# Altium PCB CoreV1.1_test.PcbDoc (part 4 of 14)
Units mil, origin at the board's own origin, x right, y up, seen from the top; angles counter-clockwise.
Board outline 2860 x 2420 mil, 6 copper layers (Top Layer, GND, SIGNAL_1, SIGNAL_2, POWER, Bottom Layer); 110 components, 241 nets, 882 pads, 697 vias.
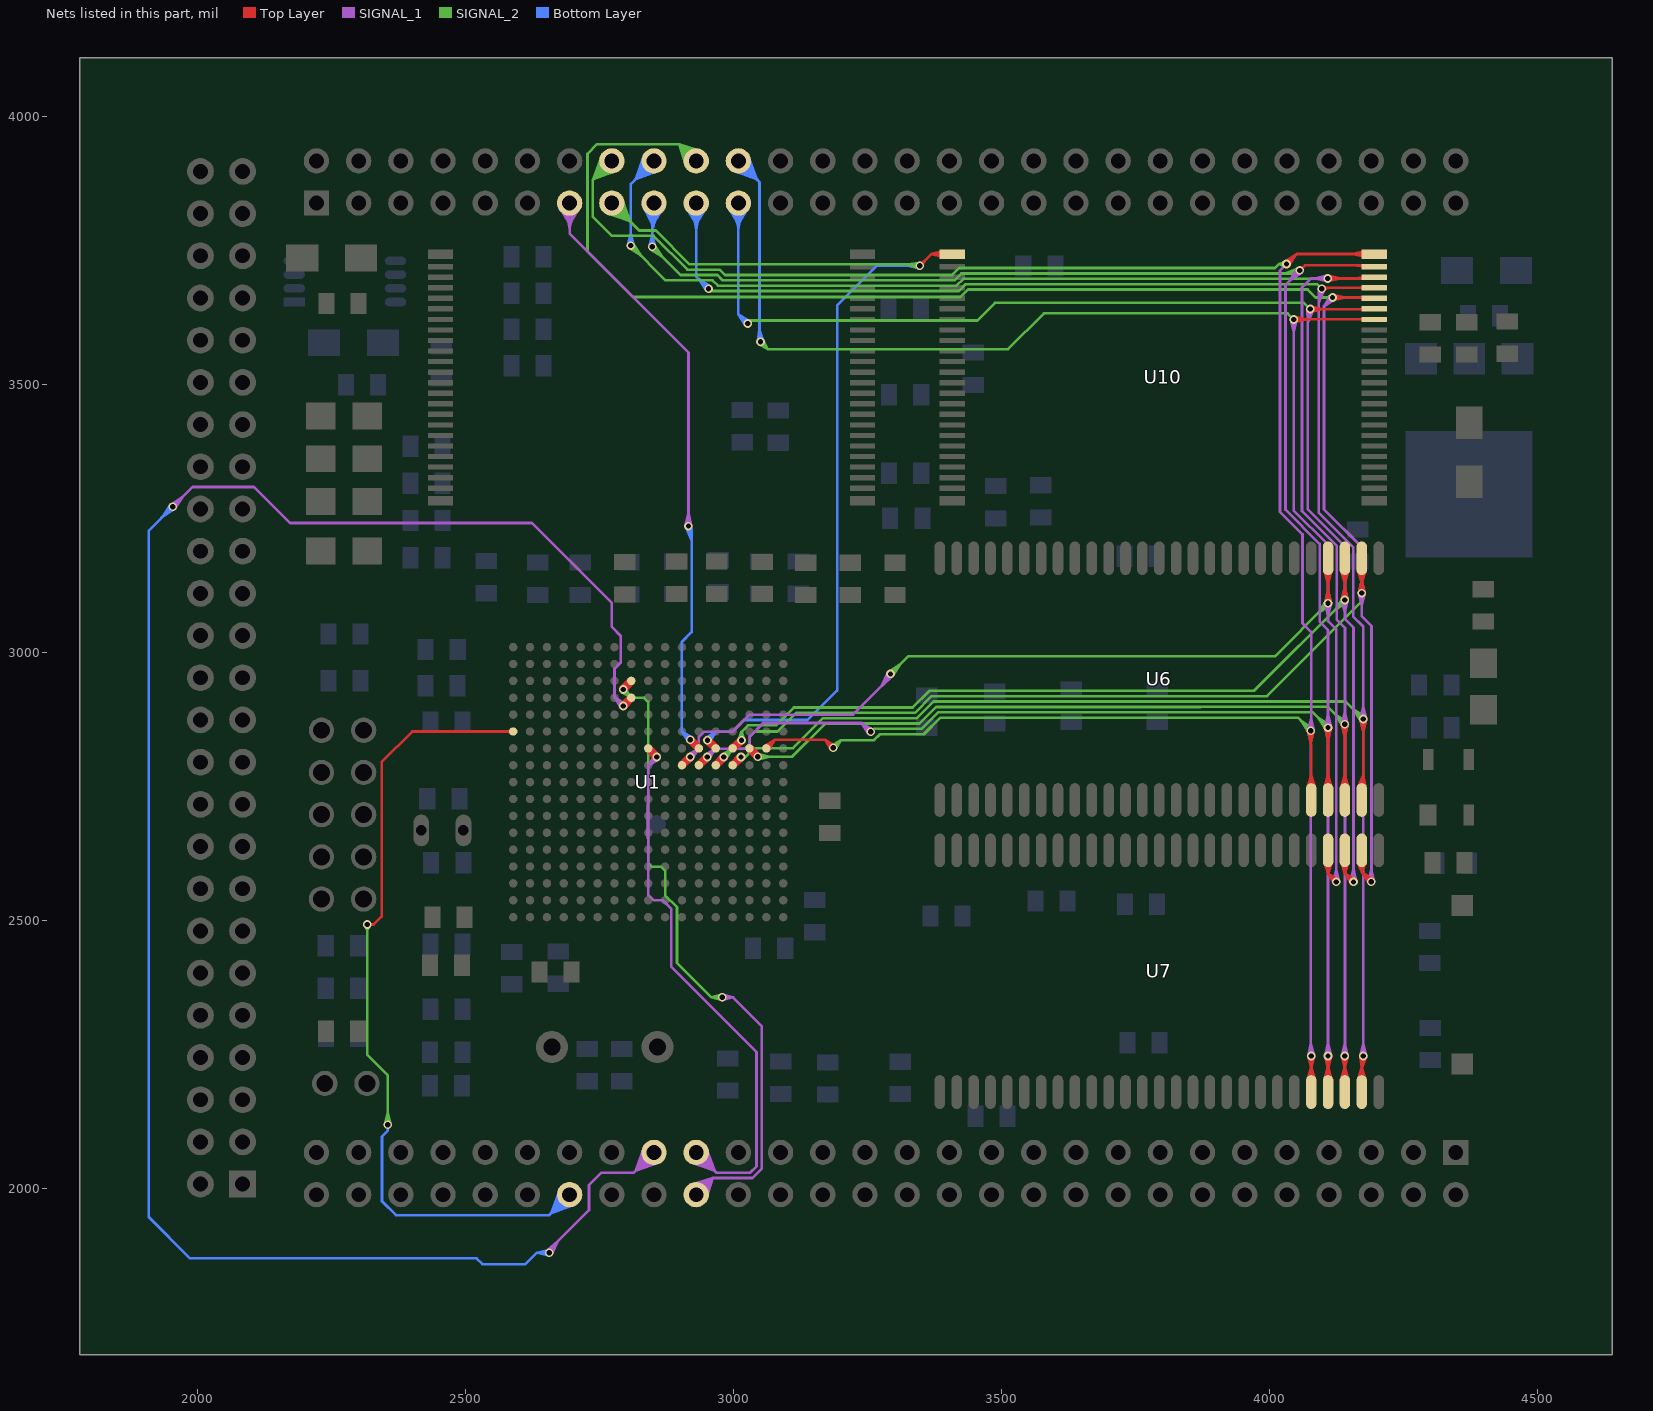
[diagram p8: the nets of this part, all layers, seen from the top]

## Via types
v1: diameter 16, hole 10, Top Layer to Bottom Layer, tented both sides, 637 vias
v2: diameter 30, hole 18, Top Layer to Bottom Layer, tented both sides, 56 vias
v3: diameter 16, hole 10, Top Layer to Bottom Layer, 2 vias
v4: diameter 30, hole 16, Top Layer to Bottom Layer, tented both sides, 1 vias
v5: diameter 16/16/16/16 (per signal layer), hole 10, Top Layer to Bottom Layer, tented both sides, 1 vias

## Nets (pads, with @x,y where several pads share a name; then routed paths per layer and width w, separated by ;. In a path a pad name is that pad's centre, name@x,y a point inside that pad or via, vN(x,y) a via of type N, cw(c..) or ccw(c..) an arc to the next point about the centre after c; other vN are vias at no path point) (continued)
I2SSDO: pad.PA44 U1.U6 | length 2178.9
  Top Layer w5: v1(2316.5,2492.5) 2328.5,2492.5 2343.5,2507.5 2343.5,2795.5 2400.62,2852.62 U1.U6@2588.92,2852.62 ; U1.U6@2585.12,2848.82 ccw(c2575.94,2839.65) 2575.94,2852.62 ccw(c2575.94,2865.6) U1.U6@2585.12,2856.42
  SIGNAL_2 w5: v1@2312.61,2488.61 cw(c2303.22,2479.22) 2316.5,2479.22 cw(c2329.78,2479.22) v1@2320.39,2488.61 ; v1@2316.5,2488.5 2316.5,2249.58 2355,2211.08 v1(2355,2119) ; v1@2349.54,2119.66 2355,2142 v1@2360.46,2119.66 ; v1@2351.11,2122.89 ccw(c2341.72,2132.28) 2355,2132.28 ccw(c2368.28,2132.28) v1@2358.89,2122.89
  Bottom Layer w5: v1(2355,2119) 2355,2108 2344,2097 2344,1976 2370,1950 2655.92,1950 pad.PA44@2694.24,1988.32 ; pad.PA44@2673.11,1988.32 cw(c2622.12,1988.32) 2658.18,1952.26 cw(c2694.24,1916.2) pad.PA44@2694.24,1967.19 ; pad.PA44@2676.4,1999.63 2660.01,1954.09 ; pad.PA44@2678.11,1988.32 cw(c2639.19,1988.32) 2666.71,1960.79 cw(c2694.24,1933.27) pad.PA44@2694.24,1972.19 ; pad.PA44@2681.1,1997.66 2660.01,1954.09 ; pad.PA44@2683.11,1988.32 cw(c2656.26,1988.32) 2675.25,1969.33 cw(c2694.24,1950.34) pad.PA44@2694.24,1977.19 ; pad.PA44@2685.52,1995.22 2660.01,1954.09 ; pad.PA44@2689.64,1992.36 2660.01,1954.09 ; pad.PA44@2698.28,1983.72 2660.01,1954.09 ; pad.PA44@2701.14,1979.6 2660.01,1954.09 ; pad.PA44@2703.58,1975.18 2660.01,1954.09 ; pad.PA44@2705.55,1970.48 2660.01,1954.09
L3CLOCK: pad.PA39 U1.K4 | length 4883.7
  Top Layer w5: v1@2789.69,2903.63 U1.K4@2805.15,2918.92 ; v1@2791.82,2905.28 U1.K4@2812.69,2911.37 ; v1@2794.02,2905.74 ccw(c2794.02,2919.02) 2803.41,2909.63 ccw(c2812.79,2900.24) v1@2799.52,2900.24 ; v1@2797.41,2895.91 U1.K4@2812.69,2911.37 ; v1@2799.06,2898.04 U1.K4@2805.15,2918.92 ; U1.K4@2804.02,2915.61 cw(c2791.04,2915.61) 2800.22,2906.44 cw(c2809.39,2897.27) U1.K4@2809.39,2910.24 ; v1(2794.02,2900.24) U1.K4@2809.39,2915.61 ; v1(2794.02,2900.24) U1.K4@2812.69,2911.37 ; v1(2794.02,2900.24) U1.K4@2805.15,2918.92 ; v1(2794.02,2900.24) U1.K4@2809.39,2915.61 ; U1.K4@2809.39,2915.61 2790.65,2904.59 U1.K4@2809.39,2915.61 ; U1.K4@2809.39,2915.61 2798.37,2896.87 U1.K4@2809.39,2915.61
  SIGNAL_1 w5: v1@1950.04,3276.27 1972.11,3290.61 v1@1957.77,3268.54 ; v1(1953.5,3272) 1990.5,3309 2105,3309 2172.4,3241.6 2624.18,3241.6 2773,3092.78 2773,3047.8 2789.5,3031.3 2789.5,2980.92 2778.02,2969.44 2778.02,2916.24 ; v1@1953.5,3277.5 ccw(c1953.5,3290.78) 1962.89,3281.39 ccw(c1972.28,3272) v1@1959,3272 ; v1@2652.01,1883.78 2672.34,1901.26 ; v1@2656.5,1880 cw(c2669.59,1880) 2660.33,1889.25 ; v1@2660.68,1877.11 2672.34,1901.26 ; v1@2661.5,1880 cw(c2686.66,1880) 2668.87,1897.79 ; v1@2788.52,2900.24 ccw(c2775.24,2900.24) 2784.63,2909.63 ccw(c2794.02,2919.02) v1@2794.02,2905.74 ; v1@2789.68,2896.85 2778.02,2916.24 ; v1@2797.4,2904.57 2778.02,2916.24 ; pad.PA39@2830.59,2067.06 cw(c2779.6,2067.06) 2815.66,2031 cw(c2851.72,1994.94) pad.PA39@2851.72,2045.93 ; pad.PA39@2833.88,2078.37 2817.49,2032.83 ; pad.PA39@2835.59,2067.06 cw(c2796.67,2067.06) 2824.19,2039.53 cw(c2851.72,2012.01) pad.PA39@2851.72,2050.93 ; pad.PA39@2838.58,2076.4 2817.49,2032.83 ; pad.PA39@2840.59,2067.06 cw(c2813.74,2067.06) 2832.73,2048.07 cw(c2851.72,2029.08) pad.PA39@2851.72,2055.93 ; pad.PA39@2843,2073.97 2817.49,2032.83 ; pad.PA39@2847.12,2071.1 2817.49,2032.83 ; pad.PA39@2851.72,2067.06 2814,2029.34 2753.84,2029.34 2730.5,2006 2730.5,1959.42 2656,1884.92 v1(2656,1880) 2672.34,1901.26 ; pad.PA39@2855.76,2062.46 2817.49,2032.83 ; pad.PA39@2858.62,2058.34 2817.49,2032.83 ; pad.PA39@2861.06,2053.92 2817.49,2032.83 ; pad.PA39@2863.03,2049.22 2817.49,2032.83 ; 2778.02,2916.24 v1(2794.02,2900.24) 2778.02,2916.24
  Bottom Layer w5: v1@1948,3272 cw(c1934.72,3272) 1944.11,3262.61 cw(c1953.5,3253.22) v1@1953.5,3266.5 ; v1@1949.23,3275.46 1934.89,3253.39 v1@1956.96,3267.73 ; v1(1953.5,3272) 1909,3227.5 1909,1946.15 1985.59,1869.56 2520.3,1869.56 2531.36,1858.5 2611.56,1858.5 2633.06,1880 ; v1@2652.11,1876.11 ccw(c2642.72,1866.72) 2642.72,1880 ccw(c2642.72,1893.28) v1@2652.11,1883.89 ; v1@2655.34,1874.54 2633.06,1880 ; v1@2655.34,1885.46 2633.06,1880 ; 2633.06,1880 v1(2656,1880) 2633.06,1880
L3DATA: pad.PA38 U1.K3 | length 2277.3
  Top Layer w5: v1@2789.6,2934.3 U1.K3@2805.15,2950.41 ; v1@2791.65,2935.97 U1.K3@2812.69,2942.87 ; v1@2794,2936.5 ccw(c2794,2948.04) 2802.16,2939.88 ; v1@2797.5,2926.76 U1.K3@2812.69,2942.87 ; v1@2799.07,2928.87 U1.K3@2805.15,2950.41 ; v1@2799.5,2931 cw(c2814.52,2931) U1.K3@2803.9,2941.62 ; U1.K3@2804.02,2947.11 cw(c2791.04,2947.11) 2800.22,2937.94 cw(c2809.39,2928.76) U1.K3@2809.39,2941.74 ; v1(2794,2931) U1.K3@2809.39,2947.11 ; v1(2794,2931) U1.K3@2812.69,2942.87 ; v1(2794,2931) U1.K3@2805.15,2950.41 ; v1(2794,2931) U1.K3@2809.39,2947.11 ; v1@2794,2931.72 U1.K3@2809.39,2947.11 ; v1@2794,2931.72 U1.K3@2812.69,2942.87 ; v1@2794,2931.72 U1.K3@2805.15,2950.41 ; v1@2794,2931.72 U1.K3@2809.39,2947.11 ; U1.K3@2809.39,2947.11 2790.52,2935.26 U1.K3@2809.39,2947.11 ; U1.K3@2809.39,2947.11 2798.42,2927.72 U1.K3@2809.39,2947.11
  SIGNAL_1 w5: pad.PA38@2919.54,2006.4 2961.58,2019.44 ; pad.PA38@2921.34,2001.61 2961.58,2019.44 ; pad.PA38@2923.65,1997.11 2961.58,2019.44 ; pad.PA38@2926.44,1992.94 2961.58,2019.44 ; pad.PA38@2930.46,1988.32 2961.58,2019.44 ; pad.PA38@2932.22,2004.34 ccw(c2935.16,2031.12) 2954.21,2012.07 ccw(c2973.26,1993.02) pad.PA38@2946.48,1990.08 ; pad.PA38@2932.76,2009.31 ccw(c2936.62,2044.39) 2961.58,2019.44 ; pad.PA38@2935.08,1984.3 2961.58,2019.44 ; pad.PA38@2939.25,1981.51 2961.58,2019.44 ; pad.PA38@2943.75,1979.2 2961.58,2019.44 ; pad.PA38@2948.54,1977.4 2961.58,2019.44 ; pad.PA38@2951.45,1990.62 cw(c2986.53,1994.48) 2961.58,2019.44 ; v3(2979,2356.5) 2999,2356.5 ; v3@2979.76,2351.05 2999,2356.5 ; v3@2979.76,2361.95 2999,2356.5 ; v3@2982.89,2352.61 cw(c2992.28,2343.22) 2992.28,2356.5 cw(c2992.28,2369.78) v3@2982.89,2360.39 ; 2961.58,2019.44 3035.44,2019.44 3053,2037 3053,2302.5 2999,2356.5
  SIGNAL_2 w5: v1@2790.5,2926.75 2808.5,2915.5 ; v1@2793.5,2930.5 2808.5,2915.5 ; v1@2794,2925.5 cw(c2794,2914.64) 2801.68,2922.32 ; v1(2794,2931) 2808.5,2915.5 ; v1@2798.47,2934.21 2808.5,2915.5 ; v1@2799.5,2931 ccw(c2815.19,2931) 2804.1,2919.9 ; 2840.5,2654.46 2840.5,2717.42 ; 2840.76,2621.68 2840.76,2606.74 2847.47,2600.03 2865.47,2600.03 2872.51,2592.99 2872.51,2546.99 2894.5,2525 2894.5,2420.58 2958.58,2356.5 ; 2840.77,2896.11 2840.77,2907.73 2833,2915.5 2808.5,2915.5 ; 2840.89,2830.21 2840.89,2896 ; 2841.01,2621.93 2841.01,2653.94 ; 2841.02,2717.94 2841.02,2830.08 ; v3@2975.11,2352.61 ccw(c2965.72,2343.22) 2965.72,2356.5 ccw(c2965.72,2369.78) v3@2975.11,2360.39 ; v3@2978.26,2351.05 2958.58,2356.5 ; v3@2978.26,2361.95 2958.58,2356.5 ; 2958.58,2356.5 v3(2979,2356.5) 2958.58,2356.5
L3MODE: pad.PA37 U1.J7 | length 1972
  Top Layer w5: U1.J7@2840.89,2815.75 cw(c2840.89,2802.78) 2850.06,2811.95 cw(c2859.23,2821.13) U1.J7@2846.26,2821.13 ; v1@2851.51,2805 ccw(c2838.23,2805) 2847.62,2814.39 ccw(c2857.01,2823.78) v1@2857.01,2810.5 ; v1@2852,2802.72 U1.J7@2845.11,2824.45 ; v1@2852.68,2801.61 U1.J7@2840.89,2821.13 ; v1@2853.59,2800.69 U1.J7@2837.56,2816.9 ; v1@2859.29,2810.01 U1.J7@2837.56,2816.9 ; v1@2860.4,2809.33 U1.J7@2840.89,2821.13 ; v1@2861.32,2808.42 U1.J7@2845.11,2824.45 ; U1.J7@2837.56,2816.9 v1(2857.01,2805) ; U1.J7@2837.56,2816.9 v1(2857.01,2805) ; U1.J7@2840.89,2821.13 v1(2857.01,2805) ; U1.J7@2840.89,2821.13 v1(2857.01,2805) ; U1.J7@2845.11,2824.45 v1(2857.01,2805) ; U1.J7@2845.11,2824.45 v1(2857.01,2805)
  SIGNAL_1 w5: 2840.5,2654.46 2840.5,2717.42 ; 2840.76,2608.84 2840.76,2621.68 ; 2841.01,2643.73 2841.01,2653.94 ; 2841,2714.91 2841,2789 ; 2841.23,2608.37 2841.23,2547.64 2851.37,2537.5 2868.16,2537.5 2884,2521.66 2884,2413.5 3043,2254.5 3043,2041.14 3031.3,2029.44 2968.07,2029.44 pad.PA37@2930.46,2067.06 ; 2841.24,2622.16 2841.24,2643.5 ; v1@2851.51,2805 cw(c2838.23,2805) 2847.62,2795.61 cw(c2857.01,2786.23) v1@2857.01,2799.5 ; v1@2852.68,2808.39 2841,2789 ; v1@2860.4,2800.67 2841,2789 ; pad.PA37@2919.14,2049.22 2964.68,2032.83 ; pad.PA37@2921.11,2053.92 2964.68,2032.83 ; pad.PA37@2923.55,2058.34 2964.68,2032.83 ; pad.PA37@2926.41,2062.46 2964.68,2032.83 ; pad.PA37@2930.46,2045.93 cw(c2930.46,1994.94) 2966.51,2031 cw(c3002.57,2067.06) pad.PA37@2951.58,2067.06 ; pad.PA37@2930.46,2050.93 cw(c2930.46,2012.01) 2957.98,2039.53 cw(c2985.5,2067.06) pad.PA37@2946.58,2067.06 ; pad.PA37@2930.46,2055.93 cw(c2930.46,2029.08) 2949.44,2048.07 cw(c2968.43,2067.06) pad.PA37@2941.58,2067.06 ; pad.PA37@2935.05,2071.1 2964.68,2032.83 ; pad.PA37@2939.17,2073.97 2964.68,2032.83 ; pad.PA37@2943.6,2076.4 2964.68,2032.83 ; pad.PA37@2948.29,2078.37 2964.68,2032.83 ; 2841,2789 v1(2857.01,2805) 2841,2789
LADDR0: pad.PC13 U1.F7 | length 2195.8
  Top Layer w5: v1@2915.18,2833.59 U1.F7@2931.15,2817.81 ; v1@2917.24,2831.98 U1.F7@2938.69,2825.35 ; v1@2919.5,2831.5 cw(c2919.5,2818.22) 2928.89,2827.61 cw(c2938.28,2837) v1@2925,2837 ; v1@2922.91,2841.32 U1.F7@2938.69,2825.35 ; v1@2924.52,2839.26 U1.F7@2931.15,2817.81 ; U1.F7@2930,2821.13 ccw(c2917.03,2821.13) 2926.2,2830.3 ccw(c2935.37,2839.47) U1.F7@2935.37,2826.5 ; v1(2919.5,2837) U1.F7@2935.37,2821.13 ; v1(2919.5,2837) U1.F7@2931.15,2817.81 ; v1(2919.5,2837) U1.F7@2938.69,2825.35 ; v1(2919.5,2837) U1.F7@2935.37,2821.13 ; U1.F7@2935.37,2821.13 2923.84,2840.38 U1.F7@2935.37,2821.13 ; U1.F7@2935.37,2821.13 2916.12,2832.66 U1.F7@2935.37,2821.13
  SIGNAL_1 w5: pad.PC13@2673.92,3832.93 2694.24,3800.09 ; pad.PC13@2678.47,3835.34 2694.24,3800.09 ; pad.PC13@2679.3,3823.77 cw(c2643.24,3787.72) 2694.24,3787.72 cw(c2745.23,3787.72) pad.PC13@2709.17,3823.77 ; pad.PC13@2682.84,3827.31 cw(c2655.31,3799.79) 2694.24,3799.79 cw(c2733.16,3799.79) pad.PC13@2705.64,3827.31 ; pad.PC13@2683.23,3837.11 2694.24,3800.09 ; pad.PC13@2686.37,3830.84 cw(c2667.39,3811.86) 2694.24,3811.86 cw(c2721.09,3811.86) pad.PC13@2702.1,3830.84 ; pad.PC13@2688.13,3838.22 2694.24,3800.09 ; pad.PC13@2694.24,3838.71 2694.24,3781.76 2916,3560 v1(2916,3236) ; pad.PC13@2700.34,3838.22 2694.24,3800.09 ; pad.PC13@2705.24,3837.11 2694.24,3800.09 ; pad.PC13@2710,3835.34 2694.24,3800.09 ; pad.PC13@2714.55,3832.93 2694.24,3800.09 ; v1@2910.54,3236.66 2916,3259 v1@2921.46,3236.66 ; v1@2912.11,3239.89 ccw(c2902.72,3249.28) 2916,3249.28 ccw(c2929.28,3249.28) v1@2919.89,3239.89
  Bottom Layer w5: v1@2910.77,3234.28 2922,3208.91 ; v1@2912.11,3232.11 cw(c2888.24,3208.24) 2922,3208.24 ; v1@2914,2837 ccw(c2900.72,2837) 2910.11,2846.39 ccw(c2919.5,2855.78) v1@2919.5,2842.5 ; v1@2915.17,2833.61 2903.5,2853 ; v1@2915.65,3235.65 cw(c2900.31,3220.31) 2922,3220.31 ; v1@2921.46,3236.65 2922,3208.91 ; v1@2922.89,2841.33 2903.5,2853 ; 2903.5,2853 v1(2919.5,2837) 2903.5,2853 ; 2903.5,2853 2903.5,3019.58 2922,3038.08 2922,3230 v1(2916,3236) 2922,3208.91
LADDR1: pad.PC15 U1.E7 U10.25 | length 3122.2
  Top Layer w5: v1@2947.17,2833.1 U1.E7@2962.63,2817.82 ; v1@2949.3,2831.45 U1.E7@2970.17,2825.37 ; v1@2951.5,2831 cw(c2951.5,2817.72) 2960.89,2827.11 cw(c2970.28,2836.5) v1@2957,2836.5 ; v1@2954.89,2840.83 U1.E7@2970.17,2825.37 ; v1@2956.54,2838.69 U1.E7@2962.63,2817.82 ; U1.E7@2961.5,2821.13 ccw(c2948.52,2821.13) 2957.7,2830.3 ccw(c2966.87,2839.47) U1.E7@2966.87,2826.5 ; v1(3347.5,3721.5) 3369.68,3743.68 U10.25@3408.42,3743.68 U10.25@3407.6,3744.5 ; v1@3347.5,3727 ccw(c3347.5,3740.28) 3356.89,3730.89 ccw(c3366.28,3721.5) v1@3353,3721.5 ; U10.25@3389.16,3739.18 ccw(c3378.31,3728.33) 3378.31,3743.68 ccw(c3378.31,3759.03) U10.25@3389.16,3748.18 ; U10.25@3392.81,3737.38 3369.8,3743.68 ; U10.25@3392.81,3749.98 3369.8,3743.68 ; U10.25@3393.66,3743.68 3369.8,3743.68 ; v1(2951.5,2836.5) U1.E7@2966.87,2821.13 ; v1(2951.5,2836.5) U1.E7@2962.63,2817.82 ; v1(2951.5,2836.5) U1.E7@2970.17,2825.37 ; v1(2951.5,2836.5) U1.E7@2966.87,2821.13 ; U1.E7@2966.87,2821.13 2955.85,2839.86 U1.E7@2966.87,2821.13 ; U1.E7@2966.87,2821.13 2948.13,2832.15 U1.E7@2966.87,2821.13
  SIGNAL_2 w5: pad.PC15@2761.66,3820.87 2807.2,3804.48 ; pad.PC15@2763.63,3825.57 2807.2,3804.48 ; pad.PC15@2766.07,3829.99 2807.2,3804.48 ; pad.PC15@2768.93,3834.11 2807.2,3804.48 ; pad.PC15@2772.98,3817.59 cw(c2772.98,3766.59) 2809.03,3802.65 cw(c2845.09,3838.71) pad.PC15@2794.1,3838.71 ; pad.PC15@2772.98,3822.59 cw(c2772.98,3783.66) 2800.5,3811.19 cw(c2828.02,3838.71) pad.PC15@2789.1,3838.71 ; pad.PC15@2772.98,3827.59 cw(c2772.98,3800.74) 2791.96,3819.72 cw(c2810.95,3838.71) pad.PC15@2784.1,3838.71 ; pad.PC15@2772.98,3838.71 2824.18,3787.5 2855.14,3787.5 2918.14,3724.5 3344.5,3724.5 v1(3347.5,3721.5) 3323.7,3724.5 ; pad.PC15@2777.57,3842.75 2807.2,3804.48 ; pad.PC15@2781.69,3845.62 2807.2,3804.48 ; pad.PC15@2786.12,3848.05 2807.2,3804.48 ; pad.PC15@2790.81,3850.03 2807.2,3804.48 ; 3326.98,3724.5 cw(c3326.98,3700.98) v1@3343.61,3717.61 ; 3339.05,3724.5 cw(c3339.05,3713.05) v1@3347.15,3721.15 ; v1@3346.19,3716.16 3323.7,3724.5 ; v1@3347.56,3727 3323.7,3724.5
  Bottom Layer w5: v1@2948.12,2840.84 2967.26,2852.25 ; v1(2951.5,2836.5) 2967.26,2852.25 ; v1@2951.5,2842 ccw(c2951.5,2855.27) 2960.89,2845.89 ccw(c2970.28,2836.5) v1@2957,2836.5 ; v1@2955.84,2833.12 2967.26,2852.25 ; v1@3343.61,3717.61 ccw(c3334.22,3708.22) 3334.22,3721.5 ccw(c3334.22,3734.78) v1@3343.61,3725.39 ; v1@3346.84,3716.04 3324.5,3721.5 ; v1@3346.84,3726.96 3324.5,3721.5 ; 2967.26,2852.25 2983.75,2852.25 2984,2852 2997.5,2852 3019.49,2873.99 3138.28,2873.99 3193.5,2929.22 3193.5,3648 3267,3721.5 v1(3347.5,3721.5) 3324.5,3721.5
LADDR2: pad.PC16 U1.B7 U6.23 U7.23 U10.24 | length 6123.8
  Top Layer w5: U1.B7@3058.03,2825.35 3077.48,2837.25 ; U1.B7@3061.36,2826.5 ccw(c3061.36,2839.47) 3070.53,2830.3 ccw(c3079.71,2821.13) U1.B7@3066.73,2821.13 ; U1.B7@3062.13,2821.13 U1.B7@3061.36,2821.13 3077.48,2837.25 ; U1.B7@3065.58,2817.8 3077.48,2837.25 ; v1@3180.5,2822 ccw(c3167.22,2822) 3176.61,2831.39 ccw(c3186,2840.78) v1@3186,2827.5 ; v1@3181.65,2818.64 3170.75,2837.25 ; v1@3189.36,2826.35 3170.75,2837.25 ; v1@4028.54,3729.27 4050.61,3743.61 v1@4036.27,3721.54 ; v1(4032,3725) 4050.68,3743.68 U10.24@4195.83,3743.68 ; v1@4032,3730.5 ccw(c4032,3743.78) 4041.39,3734.39 ccw(c4050.78,3725) v1@4037.5,3725 ; U7.23@4070.78,2202.47 4078.04,2226.23 ; U6.23@4070.78,2747.47 4078.04,2771.23 ; v1@4072.04,2853.34 4077.5,2831 v1@4082.96,2853.34 ; v1@4072.58,2246.34 4078.04,2224 v1@4083.5,2246.34 ; U7.23@4072.85,2206.58 ccw(c4060.31,2219.11) 4078.04,2219.11 ccw(c4095.77,2219.11) U7.23@4083.23,2206.58 ; U6.23@4072.85,2751.58 ccw(c4060.31,2764.11) 4078.04,2764.11 ccw(c4095.77,2764.11) U6.23@4083.23,2751.58 ; v1@4073.61,2850.11 cw(c4064.22,2840.72) 4077.5,2840.72 cw(c4090.78,2840.72) v1@4081.39,2850.11 ; v1@4074.15,2243.11 cw(c4064.76,2233.72) 4078.04,2233.72 cw(c4091.32,2233.72) v1@4081.93,2243.11 ; 4077.5,2829.54 v1(4077.5,2854) ; U7.23@4078.04,2179.73 v1(4078.04,2247) ; U7.23@4078.04,2201.39 4078.04,2226.23 ; U6.23@4078.04,2724.73 4078.04,2829 ; U6.23@4078.04,2746.39 4078.04,2771.23 ; U7.23@4085.3,2202.47 4078.04,2226.23 ; U6.23@4085.3,2747.47 4078.04,2771.23 ; U10.24@4176.57,3739.18 ccw(c4165.71,3728.33) 4165.71,3743.68 ccw(c4165.71,3759.03) U10.24@4176.57,3748.18 ; U10.24@4180.22,3737.38 4157.2,3743.68 ; U10.24@4180.22,3749.98 4157.2,3743.68 ; U10.24@4181.06,3743.68 4157.2,3743.68 ; 3077.48,2837.25 3170.75,2837.25 ; 3170.75,2837.25 v1(3186,2822) 3170.75,2837.25
  SIGNAL_1 w5: v1(4032,3725) 4020,3713 4020,3262.5 4062.04,3220.46 4062.04,3054.6 4078.04,3038.6 4078.04,2854.54 v1(4077.5,2854) ; v1@4072.04,2853.34 4077.5,2831 ; v1@4072.06,2854.78 4078.04,2877.02 ; v1@4072.57,2247.53 4077.5,2270.02 ; v1@4073.61,2850.11 cw(c4064.22,2840.72) 4077.5,2840.72 cw(c4090.78,2840.72) v1@4081.39,2850.11 ; v1@4073.61,2857.89 ccw(c4062.92,2868.58) 4078.04,2868.58 ; v1@4074.15,2250.89 ccw(c4066.07,2258.97) 4077.5,2258.97 ; v1@4077.5,2247.54 v1(4077.5,2854) ; 4077.5,2261.58 ccw(c4092.62,2261.58) v1@4081.93,2250.89 ; v1(4078.04,2247) 4077.5,2270.02 ; 4078.04,2865.97 ccw(c4089.47,2865.97) v1@4081.39,2857.89 ; v1@4082.96,2853.34 4077.5,2831 ; v1@4082.97,2854.53 4078.04,2877.02 ; v1@4083.48,2247.78 4077.5,2270.02 ; 4077.5,2831 v1(4077.5,2854) ; v1(4077.5,2854) 4078.04,2877.02
  SIGNAL_2 w5: pad.PC16@2751.86,3917.2 cw(c2702.84,3916.63) 2737.5,3881.97 ; pad.PC16@2755.14,3928.77 2738.75,3883.22 ; pad.PC16@2756.86,3917.26 cw(c2719.44,3916.83) 2745.9,3890.37 cw(c2772.35,3863.92) pad.PC16@2772.79,3901.33 ; pad.PC16@2759.84,3926.79 2738.75,3883.22 ; pad.PC16@2761.85,3917.32 cw(c2736.05,3917.02) 2754.3,3898.77 cw(c2772.55,3880.52) pad.PC16@2772.85,3906.33 ; pad.PC16@2764.26,3924.36 2738.75,3883.22 ; pad.PC16@2768.38,3921.49 2738.75,3883.22 ; pad.PC16@2772.73,3896.33 ccw(c2772.16,3847.31) 2737.5,3881.97 ; pad.PC16@2772.98,3917.45 2737.5,3881.97 ; pad.PC16@2777.02,3912.85 2738.75,3883.22 ; pad.PC16@2779.89,3908.73 2738.75,3883.22 ; pad.PC16@2782.32,3904.31 2738.75,3883.22 ; pad.PC16@2784.29,3899.61 2738.75,3883.22 ; v1@3182.67,2826.38 3200.5,2836.5 ; v1(3186,2822) 3200.5,2836.5 ; v1@3186,2827.5 ccw(c3186,2840.78) 3195.39,2831.39 ccw(c3204.78,2822) v1@3191.5,2822 ; v1@3190.38,2818.67 3200.5,2836.5 ; v1@4028.11,3721.11 ccw(c4018.72,3711.72) 4018.72,3725 ccw(c4018.72,3738.28) v1@4028.11,3728.89 ; v1@4030.92,3719.61 4018,3725 ; v1@4030.92,3730.39 4018,3725 ; 4067.73,2864.31 cw(c4057.42,2854) v1@4072,2854 ; 4069.03,2863.01 ccw(c4077.5,2871.47) v1@4077.5,2859.5 ; v1@4073.17,2850.6 4059.25,2872.79 ; v1(4077.5,2854) 4059.25,2872.79 ; v1@4077.5,2854.54 4053.54,2878.5 3386.07,2878.5 3355.07,2847.5 3273.42,2847.5 3262.42,2836.5 3200.5,2836.5 ; v1@4081.02,2858.22 4059.25,2872.79 ; 2737.5,3881.97 2737.5,3813 2773,3777.5 2851,3777.5 2914,3714.5 2974.14,3714.5 2984.14,3704.5 3408.09,3704.5 3421.03,3717.43 4010.43,3717.43 4018,3725 ; 4018,3725 v1(4032,3725) 4018,3725
LADDR3: pad.PC17 U1.F8 U6.24 U7.24 U10.23 | length 6451
  Top Layer w5: U1.F8@2935.37,2795 ccw(c2935.37,2807.98) 2944.55,2798.8 ccw(c2953.72,2789.63) U1.F8@2940.75,2789.63 ; 2941.17,2795.43 cw(c2951,2785.6) v1@2951,2799.5 ; 2941.79,2796.05 ccw(c2932.84,2805) v1@2945.5,2805 ; v1@2945.98,2807.25 U1.F8@2939.61,2786.33 ; v1@2946.68,2808.41 U1.F8@2935.37,2789.63 ; v1@2947.64,2809.35 U1.F8@2932.07,2793.87 ; v1@2953.17,2799.95 U1.F8@2932.07,2793.87 ; v1@2954.33,2800.63 U1.F8@2935.37,2789.63 ; v1@2955.3,2801.57 U1.F8@2939.61,2786.33 ; v1(4057,3713) 4066.5,3722.5 4193.38,3722.5 U10.23@4195.83,3720.06 ; U7.24@4102.27,2202.47 4109.54,2226.23 ; U6.24@4102.27,2747.47 4109.54,2771.23 ; v1@4104.04,2859.34 4109.5,2837 v1@4114.96,2859.34 ; v1@4104.08,2246.34 4109.54,2224 v1@4115,2246.34 ; U7.24@4104.34,2206.58 ccw(c4091.81,2219.11) 4109.54,2219.11 ccw(c4127.26,2219.11) U7.24@4114.73,2206.58 ; U6.24@4104.34,2751.58 ccw(c4091.81,2764.11) 4109.54,2764.11 ccw(c4127.26,2764.11) U6.24@4114.73,2751.58 ; v1@4105.61,2856.11 cw(c4096.22,2846.72) 4109.5,2846.72 cw(c4122.78,2846.72) v1@4113.39,2856.11 ; v1@4105.65,2243.11 cw(c4096.26,2233.72) 4109.54,2233.72 cw(c4122.81,2233.72) v1@4113.43,2243.11 ; 4109.5,2832.04 v1(4109.5,2860) ; U7.24@4109.54,2179.73 v1(4109.54,2247) ; U7.24@4109.54,2201.39 4109.54,2226.23 ; U6.24@4109.54,2724.73 4109.54,2832 ; U6.24@4109.54,2746.39 4109.54,2771.23 ; U7.24@4116.8,2202.47 4109.54,2226.23 ; U6.24@4116.8,2747.47 4109.54,2771.23 ; 4157.11,3722.5 U10.23@4177.13,3720.06 ; 4165.38,3722.5 cw(c4165.38,3708.32) U10.23@4175.41,3718.35 ; U1.F8@2932.07,2793.87 v1@2950.75,2805 ; U1.F8@2932.07,2793.87 v1(2951,2805) ; U1.F8@2935.37,2789.63 v1@2950.75,2805 ; U1.F8@2935.37,2789.63 v1(2951,2805) ; U1.F8@2939.61,2786.33 v1@2950.75,2805 ; U1.F8@2939.61,2786.33 v1(2951,2805)
  SIGNAL_1 w5: v1@2947.63,2809.35 2966.5,2820.5 ; v1(2951,2805) 2966.5,2820.5 ; v1@2951,2810.5 ccw(c2951,2823.78) 2960.39,2814.39 ccw(c2969.78,2805) v1@2956.5,2805 ; v1@2955.35,2801.63 2966.5,2820.5 ; v1@3250.5,2852 ccw(c3237.22,2852) 3246.61,2861.39 ccw(c3256,2870.78) v1@3256,2857.5 ; v1@3251.68,2848.6 3239.5,2868.5 ; v1@3259.4,2856.32 3239.5,2868.5 ; v1@4051.5,3713 cw(c4038.22,3713) 4047.61,3703.61 cw(c4057,3694.22) v1@4057,3707.5 ; v1@4052.73,3716.46 4038.39,3694.39 ; v1@4060.46,3708.73 4038.39,3694.39 ; v1@4104.07,2247.65 4109.5,2270 ; v1@4104.04,2859.34 4109.5,2837 v1@4114.96,2859.34 ; v1@4104.04,2860.67 4109.54,2883 ; v1@4105.61,2856.11 cw(c4096.22,2846.72) 4109.5,2846.72 cw(c4122.78,2846.72) v1@4113.39,2856.11 ; v1@4105.61,2863.89 ccw(c4096.13,2873.37) 4109.54,2873.37 ; v1@4105.65,2250.89 ccw(c4096.34,2260.19) 4109.5,2260.19 ; v1(4109.54,2247) v1(4109.5,2860) ; 4109.5,2260.37 ccw(c4122.9,2260.37) v1@4113.43,2250.89 ; v1(4109.54,2247) 4109.5,2270 ; 4109.54,2873.19 ccw(c4122.69,2873.19) v1@4113.39,2863.89 ; v1@4114.96,2860.65 4109.54,2883 ; v1@4115,2247.67 4109.5,2270 ; 2966.5,2820.5 3021.42,2820.5 3030.5,2829.58 3030.5,2843.42 3055.58,2868.5 3239.5,2868.5 ; 3239.5,2868.5 v1(3256,2852) 3239.5,2868.5 ; 4038.39,3694.39 v1(4057,3713) 4030,3686 4030,3266.64 4094.04,3202.61 4094.04,3057.46 4109.54,3041.96 v1(4109.5,2860) v1(4109.5,2860) ; v1(4109.5,2860) 4109.54,2883
  SIGNAL_2 w5: v1@2845.04,3752.73 2867.11,3738.39 v1@2852.77,3760.46 ; v1@2848.5,3751.5 cw(c2848.5,3738.22) 2857.89,3747.61 cw(c2867.28,3757) v1@2854,3757 ; v1(2848.5,3757) 2901,3704.5 2970,3704.5 2980,3694.5 3412.23,3694.5 3425.17,3707.43 v1@4052.43,3707.43 ; v1@3261.5,2857.5 3350.93,2857.5 3381.93,2888.5 4071.86,2888.5 ; 4030.29,3707.43 ccw(c4030.29,3739.71) v1@4053.11,3716.89 ; 4042.36,3707.43 ccw(c4042.36,3727.64) v1@4056.65,3713.35 ; v1@4055.3,3718.23 4030.95,3707.43 ; v1(4057,3713) 4030.95,3707.43 ; v1@4057.59,3707.53 4030.95,3707.43 ; 4072,2888.64 4080.86,2888.64 v1(4109.5,2860) 4090.89,2878.61 ; v1@4104,2860 ccw(c4090.72,2860) 4100.11,2869.39 ccw(c4109.5,2878.78) v1@4109.5,2865.5 ; v1@4105.23,2856.54 4090.89,2878.61 ; v1@4112.96,2864.27 4090.89,2878.61
  Bottom Layer w5: pad.PC17@2830.98,3834.67 2848.5,3799.96 ; pad.PC17@2835.72,3836.68 2848.5,3799.96 ; pad.PC17@2836.78,3823.77 cw(c2808.49,3795.48) 2848.5,3795.48 ; pad.PC17@2840.32,3827.31 cw(c2820.56,3807.55) 2848.5,3807.55 ; pad.PC17@2840.61,3838.03 2848.5,3799.96 ; v1@2843.04,3757.66 2848.5,3780 v1@2853.96,3757.66 ; v1@2844.61,3760.89 ccw(c2835.22,3770.28) 2848.5,3770.28 ccw(c2861.78,3770.28) v1@2852.39,3760.89 ; pad.PC17@2845.59,3838.73 2848.5,3799.96 ; v1(2848.5,3757) 2848.5,3835.49 pad.PC17@2851.72,3838.71 2848.5,3799.96 ; 2848.5,3779.95 cw(c2910.47,3779.95) pad.PC17@2866.65,3823.77 ; 2848.5,3792.02 cw(c2898.4,3792.02) pad.PC17@2863.12,3827.31 ; 2848.5,3804.09 cw(c2886.33,3804.09) pad.PC17@2859.58,3830.84 ; pad.PC17@2857.76,3837.72 2848.5,3799.96 ; pad.PC17@2862.55,3836.21 2848.5,3799.96 ; pad.PC17@2867.16,3834.07 2848.5,3799.96 ; pad.PC17@2871.5,3831.31 2848.5,3799.96
LADDR4: pad.PC18 U1.C7 U6.25 U7.25 U10.22 | length 6409.8
  Top Layer w5: U1.C7@3029.86,2815.75 cw(c3029.86,2802.78) 3039.04,2811.95 cw(c3048.21,2821.13) U1.C7@3035.24,2821.13 ; v1@3040,2805.49 ccw(c3026.72,2805.49) 3036.11,2814.88 ccw(c3045.5,2824.27) v1@3045.5,2810.99 ; v1@3040.47,2803.26 U1.C7@3034.1,2824.44 ; v1@3041.16,2802.11 U1.C7@3029.86,2821.13 ; v1@3042.1,2801.16 U1.C7@3026.55,2816.89 ; v1@3047.73,2810.52 U1.C7@3026.55,2816.89 ; v1@3048.88,2809.83 U1.C7@3029.86,2821.13 ; v1@3049.82,2808.89 U1.C7@3034.1,2824.44 ; v1(4109,3698) 4193.45,3698 U10.22@4195.83,3700.37 ; v1@4109.66,3692.54 4132,3698 v1@4109.66,3703.46 ; v1@4112.89,3694.11 cw(c4122.28,3684.72) 4122.28,3698 cw(c4122.28,3711.28) v1@4112.89,3701.89 ; U7.25@4133.77,2202.47 4141.03,2226.23 ; U6.25@4133.77,2747.47 4141.03,2771.23 ; v1@4135.57,2246.34 4141.03,2224 v1@4146.49,2246.34 ; v1@4135.57,2865.34 4141.03,2843 v1@4146.49,2865.34 ; U7.25@4135.84,2206.58 ccw(c4123.31,2219.11) 4141.03,2219.11 ccw(c4158.76,2219.11) U7.25@4146.22,2206.58 ; U6.25@4135.84,2751.58 ccw(c4123.31,2764.11) 4141.03,2764.11 ccw(c4158.76,2764.11) U6.25@4146.22,2751.58 ; v1@4137.14,2243.11 cw(c4127.75,2233.72) 4141.03,2233.72 cw(c4154.31,2233.72) v1@4144.92,2243.11 ; v1@4137.14,2862.11 cw(c4127.75,2852.72) 4141.03,2852.72 cw(c4154.31,2852.72) v1@4144.92,2862.11 ; U7.25@4141.03,2179.73 v1(4141.03,2247) ; U7.25@4141.03,2201.39 4141.03,2226.23 ; U6.25@4141.03,2724.73 v1(4141.03,2866) ; U6.25@4141.03,2746.39 4141.03,2771.23 ; U7.25@4148.29,2202.47 4141.03,2226.23 ; U6.25@4148.29,2747.47 4141.03,2771.23 ; 4157.13,3698 U10.22@4177.13,3700.37 ; 4165.55,3698 ccw(c4165.55,3711.95) U10.22@4175.41,3702.09 ; U1.C7@3026.55,2816.89 v1(3045.5,2805.49) ; U1.C7@3026.55,2816.89 v1(3045.5,2805.49) ; U1.C7@3029.86,2821.13 v1(3045.5,2805.49) ; U1.C7@3029.86,2821.13 v1(3045.5,2805.49) ; U1.C7@3034.1,2824.44 v1(3045.5,2805.49) ; U1.C7@3034.1,2824.44 v1(3045.5,2805.49)
  SIGNAL_1 w5: v1@4105.11,3694.11 ccw(c4095.72,3684.72) 4095.72,3698 ccw(c4095.72,3711.28) v1@4105.11,3701.89 ; v1@4108.34,3692.54 4086,3698 ; v1@4108.34,3703.46 4086,3698 ; v1@4135.57,2247.66 4141.03,2270 v1@4146.49,2247.66 ; v1@4135.57,2865.34 4141.03,2843 v1@4146.49,2865.34 ; v1@4135.57,2866.66 4141.03,2889 v1@4146.49,2866.66 ; v1@4137.14,2250.89 ccw(c4127.75,2260.28) 4141.03,2260.28 ccw(c4154.31,2260.28) v1@4144.92,2250.89 ; v1@4137.14,2862.11 cw(c4127.75,2852.72) 4141.03,2852.72 cw(c4154.31,2852.72) v1@4144.92,2862.11 ; v1@4137.14,2869.89 ccw(c4127.75,2879.28) 4141.03,2879.28 ccw(c4154.31,2879.28) v1@4144.92,2869.89 ; v1(4141.03,2247) v1(4141.03,2866) 4141.03,3046.18 4125.53,3061.68 4125.53,3199.39 4061,3263.93 4061,3681.43 4077.57,3698 v1(4109,3698) 4086,3698
  SIGNAL_2 w5: v1@2805.04,3755.15 2827.11,3740.82 v1@2812.77,3762.89 ; v1@2808.5,3753.93 cw(c2808.5,3740.65) 2817.89,3750.04 cw(c2827.28,3759.43) v1@2814,3759.43 ; v1(2808.5,3759.43) 2873.43,3694.5 2961.14,3694.5 2971.14,3684.5 3416.38,3684.5 3429.31,3697.43 v1@4108.43,3697.43 ; v1(3045.5,2805.49) 3109.57,2805.49 3171.58,2867.5 3346.78,2867.5 3377.78,2898.5 3871.41,2898.5 ; v1@3046.16,2800.03 3068.5,2805.49 v1@3046.16,2810.95 ; v1@3049.39,2801.6 cw(c3058.78,2792.21) 3058.78,2805.49 cw(c3058.78,2818.77) v1@3049.39,2809.38 ; 3871.55,2898.64 4109.18,2898.64 v1@4141.03,2866.78 ; 4094.36,3697.43 ccw(c4094.36,3712.64) v1@4105.11,3701.89 ; 4097.09,3697.43 cw(c4097.09,3686.09) v1@4105.11,3694.11 ; 4131.09,2876.73 cw(c4120.36,2866) v1@4135.53,2866 ; 4132.98,2874.83 ccw(c4141.03,2882.89) v1@4141.03,2871.5 ; v1@4136.68,2862.63 4122.91,2884.91 ; v1(4141.03,2866) 4122.91,2884.91 ; v1@4144.58,2870.2 4122.91,2884.91
  Bottom Layer w5: v1@2803.04,3760.09 2808.5,3782.43 v1@2813.96,3760.09 ; v1@2804.61,3763.32 ccw(c2795.22,3772.71) 2808.5,3772.71 ccw(c2821.78,3772.71) v1@2812.39,3763.32 ; v1(2808.5,3759.43) 2808.5,3874.23 pad.PC18@2851.72,3917.45 ; pad.PC18@2830.59,3917.45 cw(c2779.6,3917.45) 2815.66,3881.39 cw(c2851.72,3845.33) pad.PC18@2851.72,3896.33 ; pad.PC18@2833.88,3928.77 2817.49,3883.22 ; pad.PC18@2835.59,3917.45 cw(c2796.67,3917.45) 2824.19,3889.93 cw(c2851.72,3862.4) pad.PC18@2851.72,3901.33 ; pad.PC18@2838.58,3926.79 2817.49,3883.22 ; pad.PC18@2840.59,3917.45 cw(c2813.74,3917.45) 2832.73,3898.46 cw(c2851.72,3879.48) pad.PC18@2851.72,3906.33 ; pad.PC18@2843,3924.36 2817.49,3883.22 ; pad.PC18@2847.12,3921.49 2817.49,3883.22 ; pad.PC18@2855.76,3912.85 2817.49,3883.22 ; pad.PC18@2858.62,3908.73 2817.49,3883.22 ; pad.PC18@2861.06,3904.31 2817.49,3883.22 ; pad.PC18@2863.03,3899.61 2817.49,3883.22
LADDR5: pad.PC19 U1.D8 U6.26 U7.26 U10.21 | length 6104.2
  Top Layer w5: U1.D8@2998.37,2795 ccw(c2998.37,2808.62) 3007.99,2798.99 ; U1.D8@3003.74,2789.63 cw(c3016.08,2789.63) 3007.35,2798.35 ; v1@3008.5,2805 cw(c2995.22,2805) 3004.61,2795.61 cw(c3014,2786.22) v1@3014,2799.5 ; v1@3008.98,2807.25 U1.D8@3002.57,2786.29 ; v1@3009.65,2808.37 U1.D8@2998.63,2789.63 ; v1@3009.68,2808.41 U1.D8@2998.37,2789.63 ; v1@3010.64,2809.36 U1.D8@2995.1,2793.89 ; v1@3016.17,2799.95 U1.D8@2995.1,2793.89 ; v1@3018.3,2801.57 U1.D8@3002.57,2786.29 ; v1@4097.5,3680.69 U10.21@4195.83,3680.69 ; v1@4101.39,3675.11 cw(c4114.85,3661.65) 4114.85,3680.69 ; v1@4101.39,3682.89 ccw(c4106.7,3688.2) 4106.7,3680.69 ; 4157.2,3680.69 U10.21@4177.13,3680.69 ; U7.26@4165.27,2202.47 4172.53,2226.23 ; U6.26@4165.41,2748.17 4175,2771.29 ; U7.26@4167.34,2206.58 ccw(c4154.8,2219.11) 4172.53,2219.11 ccw(c4190.25,2219.11) U7.26@4177.72,2206.58 ; U6.26@4167.34,2751.58 ccw(c4148.83,2770.08) 4175,2770.08 ; v1@4169.5,2246.93 4172.53,2223.59 ; v1@4169.54,2875.34 4175,2853 v1@4180.46,2875.34 ; U6.26@4170.87,2748.04 ccw(c4160.9,2758.01) 4175,2758.01 ; v1@4171.11,2872.11 cw(c4161.72,2862.72) 4175,2862.72 cw(c4188.28,2862.72) v1@4178.89,2872.11 ; U7.26@4172.53,2179.73 v1@4172.53,2244.53 ; U7.26@4172.53,2201.39 4172.53,2226.23 ; 4172.53,2227.75 cw(c4194.25,2227.75) v1@4178.89,2243.11 ; U6.26@4172.53,2724.73 4175,2727.2 v1(4175,2876) ; U6.26@4172.53,2746.39 4175,2771.29 ; v1(4175,2247) 4172.53,2223.59 ; 4175,2758.14 ccw(c4184.29,2758.14) U6.26@4177.72,2751.58 ; U10.21@4175.41,3678.98 ccw(c4171.28,3674.84) 4171.28,3680.69 ccw(c4171.28,3686.53) U10.21@4175.41,3682.4 ; U7.26@4179.79,2202.47 4172.53,2226.23 ; U6.26@4179.86,2746.74 4175,2771.29 ; v1@4180.36,2245.79 4172.53,2223.59 ; U1.D8@2995.1,2793.89 v1(3014,2805) ; U1.D8@2995.1,2793.89 v1(3014,2805) ; U1.D8@2998.37,2789.63 U1.D8@2998.63,2789.63 ; U1.D8@2998.37,2789.63 v1(3014,2805) ; U1.D8@2998.37,2789.63 3017.33,2800.63 U1.D8@2998.63,2789.63 ; U1.D8@2998.37,2789.63 v1(3014,2805) ; U1.D8@2998.63,2789.63 v1(3014,2805) ; U1.D8@2998.63,2789.63 v1(3014,2805) ; U1.D8@3002.57,2786.29 v1(3014,2805) ; U1.D8@3002.57,2786.29 v1(3014,2805)
  SIGNAL_1 w5: 4092,3652.44 cw(c4124.06,3652.44) v1@4101.39,3675.11 ; 4092,3664.51 cw(c4111.99,3664.51) v1@4097.85,3678.65 ; 4092,3672.88 4092,3261.21 4156.53,3196.68 4156.53,3067.47 4175,3049 v1(4175,2876) v1(4175,2247) ; v1@4092.03,3679.56 4092,3652.16 ; v1(4097.5,3679) 4092,3652.16 ; v1@4102.75,3677.36 4092,3652.16 ; v1@4169.54,2247.66 4175,2270 v1@4180.46,2247.66 ; v1@4169.54,2875.34 4175,2853 v1@4180.46,2875.34 ; v1@4169.54,2876.66 4175,2899 v1@4180.46,2876.66 ; v1@4171.11,2250.89 ccw(c4161.72,2260.28) 4175,2260.28 ccw(c4188.28,2260.28) v1@4178.89,2250.89 ; v1@4171.11,2872.11 cw(c4161.72,2862.72) 4175,2862.72 cw(c4188.28,2862.72) v1@4178.89,2872.11 ; v1@4171.11,2879.89 ccw(c4161.72,2889.28) 4175,2889.28 ccw(c4188.28,2889.28) v1@4178.89,2879.89
  SIGNAL_2 w5: v1@2958,3674.5 3420.52,3674.5 3433.45,3687.43 4089.07,3687.43 v1(4097.5,3679) ; 3022.07,2805 3038.57,2821.5 3111.44,2821.5 3167.44,2877.5 3342.64,2877.5 3373.64,2908.5 3867.27,2908.5 ; 3867.41,2908.64 4142.36,2908.64 v1(4175,2876) 4156.39,2894.61 ; v1@4169.5,2876 ccw(c4156.22,2876) 4165.61,2885.39 ccw(c4175,2894.78) v1@4175,2881.5 ; v1@4170.73,2872.54 4156.39,2894.61 ; v1@4178.46,2880.27 4156.39,2894.61
  Bottom Layer w5: pad.PC19@2910.14,3832.93 2930.46,3800.09 ; pad.PC19@2914.69,3835.34 2930.46,3800.09 ; pad.PC19@2915.52,3823.77 cw(c2879.46,3787.72) 2930.46,3787.72 cw(c2981.45,3787.72) pad.PC19@2945.39,3823.77 ; pad.PC19@2919.06,3827.31 cw(c2891.53,3799.79) 2930.46,3799.79 cw(c2969.38,3799.79) pad.PC19@2941.86,3827.31 ; pad.PC19@2919.45,3837.11 2930.46,3800.09 ; pad.PC19@2922.59,3830.84 cw(c2903.61,3811.86) 2930.46,3811.86 cw(c2957.31,3811.86) pad.PC19@2938.32,3830.84 ; pad.PC19@2924.35,3838.22 2930.46,3800.09 ; pad.PC19@2930.46,3838.71 2930.46,3702.04 v1(2953.5,3679) ; pad.PC19@2936.56,3838.22 2930.46,3800.09 ; pad.PC19@2941.46,3837.11 2930.46,3800.09 ; pad.PC19@2946.22,3835.34 2930.46,3800.09 ; v1@2948,3679 ccw(c2934.72,3679) 2944.11,3688.39 ccw(c2953.5,3697.78) v1@2953.5,3684.5 ; v1@2949.23,3675.54 2934.89,3697.61 v1@2956.96,3683.27 ; pad.PC19@2950.77,3832.93 2930.46,3800.09
LADDR6: pad.PC20 U1.E8 U6.29 U7.29 U10.20 | length 6240.2
  Top Layer w5: U1.E8@2966.87,2795 ccw(c2966.87,2807.98) 2976.04,2798.8 ccw(c2985.22,2789.63) U1.E8@2972.24,2789.63 ; 2972.44,2795.2 ccw(c2962.64,2805) v1@2976.5,2805 ; 2973.02,2795.78 cw(c2982,2786.8) v1@2982,2799.5 ; v1@2976.93,2807.14 U1.E8@2971.11,2786.33 ; v1@2977.62,2808.33 U1.E8@2966.87,2789.63 ; v1@2978.58,2809.31 U1.E8@2963.57,2793.87 ; v1@2984.22,2799.97 U1.E8@2963.57,2793.87 ; v1@2985.4,2800.67 U1.E8@2966.87,2789.63 ; v1@2986.36,2801.65 U1.E8@2971.11,2786.33 ; v1(4118,3662.5) 4194.33,3662.5 U10.20@4195.83,3661 ; v1@4118.66,3657.04 4141,3662.5 v1@4118.66,3667.96 ; v1@4121.89,3658.61 cw(c4131.28,3649.22) 4131.28,3662.5 cw(c4131.28,3675.78) v1@4121.89,3666.39 ; 4157.18,3662.5 U10.20@4177.13,3661 ; U6.29@4165.27,3153.18 4172.53,3129.42 ; U7.29@4165.32,2607.84 4172.53,2590.33 ; v1@4167.07,3111.66 4172.53,3134 v1@4177.99,3111.66 ; U7.29@4167.34,2604.07 cw(c4154.8,2591.53) 4172.53,2591.53 cw(c4190.25,2591.53) U7.29@4177.72,2604.07 ; U6.29@4167.34,3149.07 cw(c4154.8,3136.53) 4172.53,3136.53 cw(c4190.25,3136.53) U6.29@4177.72,3149.07 ; 4167.67,3662.5 cw(c4167.67,3651.55) U10.20@4175.41,3659.29 ; v1@4168.64,3114.89 ccw(c4159.25,3124.28) 4172.53,3124.28 ccw(c4185.81,3124.28) v1@4176.42,3114.89 ; U7.29@4172.53,2609.26 4172.53,2590.33 ; U7.29@4172.53,2630.91 4172.53,2590.33 ; v1(4172.53,3111) U6.29@4172.53,3175.91 ; U6.29@4172.53,3154.26 4172.53,3129.42 ; U7.29@4179.73,2607.84 4172.53,2590.33 ; U6.29@4179.79,3153.18 4172.53,3129.42 ; v1@4185,2572.36 ccw(c4171.72,2572.36) 4181.11,2581.75 ccw(c4190.5,2591.14) v1@4190.5,2577.86 ; v1@4186.21,2568.91 4172.53,2590.33 ; v1@4193.95,2576.64 4172.53,2590.33 ; U1.E8@2963.57,2793.87 v1@2982.12,2804.88 ; U1.E8@2963.57,2793.87 v1(2982,2805) ; U1.E8@2966.87,2789.63 v1@2982.12,2804.88 ; U1.E8@2966.87,2789.63 v1(2982,2805) ; U1.E8@2971.11,2786.33 v1@2982.12,2804.88 ; U1.E8@2971.11,2786.33 v1(2982,2805) ; 4172.53,2590.33 v1(4190.5,2572.36) 4172.53,2590.33
  SIGNAL_1 w5: v1@4112.5,3662.5 cw(c4099.22,3662.5) 4108.61,3653.11 cw(c4118,3643.72) v1@4118,3657 ; v1@4113.67,3665.89 4102,3646.5 ; v1@4121.39,3658.17 4102,3646.5 ; v1@4167.07,3110.34 4172.53,3088 ; v1@4167.07,3111.66 4172.53,3134 v1@4177.99,3111.66 ; v1@4168.64,3107.11 cw(c4159.25,3097.72) 4172.53,3097.72 cw(c4185.81,3097.72) v1@4176.42,3107.11 ; v1@4168.64,3114.89 ccw(c4159.25,3124.28) 4172.53,3124.28 ccw(c4185.81,3124.28) v1@4176.42,3114.89 ; v1@4177.99,3110.34 4172.53,3088 ; v1@4185.04,2573.02 4190.5,2595.36 v1@4195.96,2573.02 ; v1@4186.61,2576.25 ccw(c4177.22,2585.64) 4190.5,2585.64 ccw(c4203.78,2585.64) v1@4194.39,2576.25 ; v1(4190.5,2572.36) 4190.5,3049.5 4172.53,3067.47 v1(4172.53,3111) ; 4102,3646.5 4102,3267 4172.53,3196.47 v1(4172.53,3111) ; 4102,3646.5 v1(4118,3662.5) 4102,3646.5 ; 4172.53,3088 v1(4172.53,3111)
  SIGNAL_2 w5: pad.PC20@2909.46,3919.76 ccw(c2874.38,3923.61) 2899.34,3948.57 ; pad.PC20@2912.37,3906.53 2899.33,3948.57 ; pad.PC20@2914.43,3919.21 ccw(c2887.66,3922.15) 2906.7,3941.2 ccw(c2925.75,3960.25) pad.PC20@2928.69,3933.47 ; pad.PC20@2917.16,3908.33 2899.33,3948.57 ; pad.PC20@2921.66,3910.64 2899.33,3948.57 ; pad.PC20@2925.84,3913.43 2899.33,3948.57 ; pad.PC20@2928.15,3938.44 cw(c2924.29,3973.52) 2899.34,3948.57 ; pad.PC20@2934.47,3922.07 2899.33,3948.57 ; pad.PC20@2937.26,3926.24 2899.33,3948.57 ; pad.PC20@2939.58,3930.74 2899.33,3948.57 ; pad.PC20@2941.37,3935.53 2899.33,3948.57 ; v1@2978.63,2809.35 2997.5,2820.5 ; v1(2982,2805) 2997.5,2820.5 ; v1@2982,2810.5 ccw(c2982,2823.78) 2991.39,2814.39 ccw(c3000.78,2805) v1@2987.5,2805 ; v1@2986.35,2801.63 2997.5,2820.5 ; v1@4114.11,3658.61 ccw(c4104.72,3649.22) 4104.72,3662.5 ccw(c4104.72,3675.78) v1@4114.11,3666.39 ; v1(4118,3662.5) 4086.5,3662.5 4071.57,3677.43 3437.6,3677.43 3423.66,3663.5 2812.5,3663.5 2727.5,3748.5 2727.5,3930.5 2745.57,3948.57 2899.33,3948.57 ; v1@4167.08,3110.23 4172,3095 ; v1@4168.64,3107.11 cw(c4160.52,3099) 4172,3099 ; 4172,3096.45 cw(c4187.08,3096.45) v1@4176.42,3107.11 ; v1@4172,3110.47 4172,3095 ; v1(4172.53,3111) 4172,3095 ; v1@4177.91,3109.88 4172,3095 ; 2899.33,3948.57 pad.PC20@2930.46,3917.45 2899.33,3948.57 ; 2997.5,2820.5 3021.42,2820.5 3030.5,2829.58 3030.5,2843.42 3039.58,2852.5 3081.93,2852.5 3116.93,2887.5 3338.5,2887.5 3369.5,2918.5 3863.13,2918.5 3863.27,2918.64 3995.64,2918.64 4172,3095
LADDR7: pad.PC21 U1.D7 U6.30 U7.30 U10.19 | length 5731.8
  Top Layer w5: U1.D7@2998.37,2826.5 ccw(c2998.37,2839.47) 3007.54,2830.3 ccw(c3016.71,2821.13) U1.D7@3003.74,2821.13 ; U1.D7@3000.13,2821.13 U1.D7@2998.37,2821.13 ; U1.D7@3002.61,2825.37 cw(c3015,2812.97) v1@3015,2830.5 ; 3006.86,2829.62 ccw(c3000.47,2836) v1@3009.5,2836 ; v1@3010.1,2838.51 U1.D7@3002.62,2817.84 ; v1@3010.86,2839.62 U1.D7@2998.37,2821.13 ; v1@3011.84,2840.5 U1.D7@2995.08,2825.38 ; v1@3016.98,2830.87 U1.D7@2995.08,2825.38 ; v1@3018.13,2831.48 U1.D7@2998.37,2821.13 ; v1@3019.12,2832.36 U1.D7@3002.62,2817.84 ; v1@4077.04,3635.53 4099.51,3640.5 ; v1@4077.28,3646.45 4099.51,3640.5 ; v1@4080.39,3637.11 cw(c4088.57,3628.93) 4088.57,3640.5 ; v1@4080.39,3644.89 ccw(c4090.99,3655.49) 4090.99,3640.5 ; U6.30@4133.77,3153.18 4141.03,3129.42 ; U7.30@4133.8,2608 4141.03,2587.83 ; v1@4135.57,3098.66 4141.03,3121 v1@4146.49,3098.66 ; U7.30@4135.84,2604.07 cw(c4123.31,2591.53) 4141.03,2591.53 cw(c4158.76,2591.53) U7.30@4146.22,2604.07 ; U6.30@4135.84,3149.07 cw(c4123.31,3136.53) 4141.03,3136.53 cw(c4158.76,3136.53) U6.30@4146.22,3149.07 ; v1@4137.14,3101.89 ccw(c4127.75,3111.28) 4141.03,3111.28 ccw(c4154.31,3111.28) v1@4144.92,3101.89 ; U7.30@4141.03,2609.26 4141.03,2587.83 ; U7.30@4141.03,2630.91 4141.03,2587.83 ; v1(4141.03,3098) U6.30@4141.03,3175.91 ; U6.30@4141.03,3154.26 4141.03,3129.42 ; U7.30@4148.27,2608 4141.03,2587.83 ; U6.30@4148.29,3153.18 4141.03,3129.42 ; v1@4151.5,2571.86 ccw(c4138.22,2571.86) 4147.61,2581.25 ccw(c4157,2590.64) v1@4157,2577.36 ; v1@4152.67,2568.47 4141.03,2587.83 ; 4157.19,3640.5 U10.19@4177.13,3641.32 ; v1@4160.39,2576.19 4141.03,2587.83 ; 4169.31,3640.5 ccw(c4169.31,3649.14) U10.19@4175.41,3643.03 ; U10.19@4195.83,3641.32 4195.01,3640.5 4077,3640.5 v1(4076.5,3641) 4099.51,3640.5 ; U1.D7@2995.08,2825.38 v1@3013.24,2836 ; U1.D7@2995.08,2825.38 v1(3015,2836) ; U1.D7@2998.37,2821.13 v1@3013.24,2836 ; U1.D7@2998.37,2821.13 v1(3015,2836) ; U1.D7@3002.62,2817.84 v1@3013.24,2836 ; U1.D7@3002.62,2817.84 v1(3015,2836) ; 4141.03,2587.83 v1(4157,2571.86) 4141.03,2587.83
  SIGNAL_1 w5: v1@4071.02,3641.48 4071.5,3615.26 ; 4071.5,3615.65 cw(c4101.85,3615.65) v1@4080.39,3637.11 ; 4071.5,3627.72 cw(c4089.78,3627.72) v1@4076.85,3640.65 ; v1@4071.5,3636 4071.5,3267.57 4141.03,3198.04 v1(4141.03,3098) 4141.03,3062.47 4157,3046.5 v1(4157,2571.86) ; v1(4076.5,3641) 4071.5,3615.26 ; v1@4081.76,3639.39 4071.5,3615.26 ; v1@4135.57,3097.34 4141.03,3075 v1@4146.49,3097.34 ; v1@4135.57,3098.66 4141.03,3121 v1@4146.49,3098.66 ; v1@4137.14,3094.11 cw(c4127.75,3084.72) 4141.03,3084.72 cw(c4154.31,3084.72) v1@4144.92,3094.11 ; v1@4137.14,3101.89 ccw(c4127.75,3111.28) 4141.03,3111.28 ccw(c4154.31,3111.28) v1@4144.92,3101.89 ; v1@4151.54,2572.52 4157,2594.86 v1@4162.46,2572.52 ; v1@4153.11,2575.75 ccw(c4143.72,2585.14) 4157,2585.14 ccw(c4170.28,2585.14) v1@4160.89,2575.75
  SIGNAL_2 w5: v1@3009.58,2836.95 3015,2851.99 ; v1@3011.11,2839.89 ccw(c3001.72,2849.28) 3015,2849.28 ccw(c3028.28,2849.28) v1@3018.89,2839.89 ; v1(3015,2836) 3015,2851.99 ; v1@3020.42,2836.95 3015,2851.99 ; v1@3032,3619.5 3455,3619.5 3488,3652.5 4064.5,3652.5 4076.25,3640.75 v1@4076.5,3640.5 ; 3858.99,2928.5 3365.36,2928.5 3334.36,2897.5 3112.78,2897.5 3079.28,2863.99 3027,2863.99 3015,2851.99 ; 3859.13,2928.64 3971.67,2928.64 v1(4141.03,3098) 4122.43,3079.39 ; v1@4135.53,3098 cw(c4122.25,3098) 4131.64,3088.61 cw(c4141.03,3079.22) v1@4141.03,3092.5 ; v1@4136.76,3101.46 4122.43,3079.39 ; v1@4144.49,3093.73 4122.43,3079.39
  Bottom Layer w5: pad.PC21@2988.88,3832.93 3009.2,3800.09 ; pad.PC21@2993.43,3835.34 3009.2,3800.09 ; pad.PC21@2994.26,3823.77 cw(c2958.2,3787.72) 3009.2,3787.72 cw(c3060.19,3787.72) pad.PC21@3024.13,3823.77 ; pad.PC21@2997.8,3827.31 cw(c2970.27,3799.79) 3009.2,3799.79 cw(c3048.12,3799.79) pad.PC21@3020.6,3827.31 ; pad.PC21@2998.19,3837.11 3009.2,3800.09 ; pad.PC21@3001.33,3830.84 cw(c2982.35,3811.86) 3009.2,3811.86 cw(c3036.05,3811.86) pad.PC21@3017.06,3830.84 ; pad.PC21@3003.09,3838.22 3009.2,3800.09 ; pad.PC21@3009.2,3838.71 3009.2,3631.3 ; pad.PC21@3015.3,3838.22 3009.2,3800.09 ; pad.PC21@3020.2,3837.11 3009.2,3800.09 ; v1@3021,3614 ccw(c3007.72,3614) 3017.11,3623.39 ccw(c3026.5,3632.78) v1@3026.5,3619.5 ; v1@3022.2,3610.57 3009.2,3631.3 ; pad.PC21@3024.96,3835.34 3009.2,3800.09 ; pad.PC21@3029.51,3832.93 3009.2,3800.09 ; v1@3029.93,3618.3 3009.2,3631.3 ; 3009.2,3631.3 v1(3026.5,3614) 3009.2,3631.3
LADDR8: pad.PC22 U1.G8 U6.31 U7.31 U10.18 | length 6184.3
  Top Layer w5: U1.G8@2903.88,2795 ccw(c2903.88,2807.98) 2913.05,2798.8 ccw(c2922.23,2789.63) U1.G8@2909.25,2789.63 ; v1@2913.75,2805 cw(c2900.47,2805) 2909.86,2795.61 cw(c2919.25,2786.22) v1@2919.25,2799.5 ; v1@2914.21,2807.2 U1.G8@2908.12,2786.33 ; v1@2914.9,2808.37 U1.G8@2903.88,2789.63 ; v1@2915.86,2809.33 U1.G8@2900.58,2793.87 ; v1@2921.44,2799.96 U1.G8@2900.58,2793.87 ; v1@2922.61,2800.65 U1.G8@2903.88,2789.63 ; v1@2923.58,2801.61 U1.G8@2908.12,2786.33 ; v1(4045.5,3621.5) 4071.37,3621.5 ; v1@4046.16,3616.04 4068.5,3621.5 v1@4046.16,3626.96 ; v1@4049.39,3617.61 cw(c4058.78,3608.22) 4058.78,3621.5 cw(c4058.78,3634.78) v1@4049.39,3625.39 ; 4071.5,3621.63 U10.18@4195.83,3621.63 ; U6.31@4102.27,3153.18 4109.54,3129.42 ; U7.31@4102.3,2608.03 4109.54,2587.32 ; v1@4104.08,3092.66 4109.54,3115 v1@4115,3092.66 ; U7.31@4104.34,2604.07 cw(c4091.81,2591.53) 4109.54,2591.53 cw(c4127.26,2591.53) U7.31@4114.73,2604.07 ; U6.31@4104.34,3149.07 cw(c4091.81,3136.53) 4109.54,3136.53 cw(c4127.26,3136.53) U6.31@4114.73,3149.07 ; v1@4105.65,3095.89 ccw(c4096.26,3105.28) 4109.54,3105.28 ccw(c4122.81,3105.28) v1@4113.43,3095.89 ; U7.31@4109.54,2609.26 4109.54,2587.32 ; U7.31@4109.54,2630.91 4109.54,2587.32 ; v1(4109.54,3092) U6.31@4109.54,3175.91 ; U6.31@4109.54,3154.26 4109.54,3129.42 ; U7.31@4116.77,2608.03 4109.54,2587.32 ; U6.31@4116.8,3153.18 4109.54,3129.42 ; v1@4119.5,2571.86 ccw(c4106.22,2571.86) 4115.61,2581.25 ccw(c4125,2590.64) v1@4125,2577.36 ; v1@4120.65,2568.49 4109.54,2587.32 ; v1@4128.37,2576.21 4109.54,2587.32 ; 4157.2,3621.63 U10.18@4177.13,3621.63 ; U10.18@4175.41,3619.92 ccw(c4171.28,3615.79) 4171.28,3621.63 ccw(c4171.28,3627.48) U10.18@4175.41,3623.35 ; U1.G8@2900.58,2793.87 v1(2919.25,2805) ; U1.G8@2900.58,2793.87 v1(2919.25,2805) ; U1.G8@2903.88,2789.63 v1(2919.25,2805) ; U1.G8@2903.88,2789.63 v1(2919.25,2805) ; U1.G8@2908.12,2786.33 v1(2919.25,2805) ; U1.G8@2908.12,2786.33 v1(2919.25,2805) ; 4109.54,2587.32 v1(4125,2571.86) 4109.54,2587.32
  SIGNAL_1 w5: v1@2915.86,2809.33 2935.37,2821.13 ; v1(2919.25,2805) 2935.37,2821.13 ; v1@2919.25,2810.5 ccw(c2919.25,2823.78) 2928.64,2814.39 ccw(c2938.03,2805) v1@2924.75,2805 ; v1@2923.58,2801.61 2935.37,2821.13 ; 3279.42,2940.5 ccw(c3259.93,2960) v1@3287.5,2960 ; 3287.96,2949.04 ccw(c3277,2960) v1@3292.5,2960 ; v1@3288.25,2962.78 3276.97,2938.05 ; v1@3292.86,2959.86 v1(3293,2960) ; v1@3297.09,2956.32 3276.97,2938.05 ; v1@4040.04,3620.84 4045.5,3598.5 v1@4050.96,3620.84 ; v1@4041.61,3617.61 cw(c4032.22,3608.22) 4045.5,3608.22 cw(c4058.78,3608.22) v1@4049.39,3617.61 ; v1(4045.5,3621.5) 4045.5,3265.28 4109.54,3201.25 v1(4109.54,3092) 4109.54,3058.46 4125.04,3042.96 4125.04,2901.12 ; v1@4104.08,3091.34 4109.54,3069 v1@4115,3091.34 ; v1@4104.08,3092.66 4109.54,3115 v1@4115,3092.66 ; v1@4105.65,3088.11 cw(c4096.26,3078.72) 4109.54,3078.72 cw(c4122.81,3078.72) v1@4113.43,3088.11 ; v1@4105.65,3095.89 ccw(c4096.26,3105.28) 4109.54,3105.28 ccw(c4122.81,3105.28) v1@4113.43,3095.89 ; v1@4119.54,2572.52 4125,2594.86 v1@4130.46,2572.52 ; v1@4121.11,2575.75 ccw(c4111.72,2585.14) 4125,2585.14 ccw(c4138.28,2585.14) v1@4128.89,2575.75 ; v1(4125,2571.86) 4125,2901.08 ; 2935.37,2821.13 2935.37,2842.29 2945.08,2852 2997.74,2852 3029.74,2883.99 3222.91,2883.99 3293,2954.08 v1(3293,2960) ; 3276.97,2938.05 v1(3293,2960)
  SIGNAL_2 w5: v1@3047.19,3575.61 3064.5,3566 ; v1@3050.5,3574.5 cw(c3050.5,3561.22) 3059.89,3570.61 cw(c3069.28,3580) v1@3056,3580 ; v1(3050.5,3580) 3064.5,3566 ; v1@3054.89,3583.31 3064.5,3566 ; v1@3289.54,2964.27 3311.61,2978.61 v1@3297.27,2956.54 ; v1(3293,2960) 3326,2993 4010.54,2993 v1(4109.54,3092) 4090.93,3073.39 ; v1@3293,2965.5 ccw(c3293,2978.78) 3302.39,2969.39 ccw(c3311.78,2960) v1@3298.5,2960 ; v1@4045.37,3621.63 4034,3633 3579.5,3633 3512.5,3566 3064.5,3566 ; v1@4104.04,3092 cw(c4090.76,3092) 4100.15,3082.61 cw(c4109.54,3073.22) v1@4109.54,3086.5 ; v1@4105.26,3095.46 4090.93,3073.39 ; v1@4113,3087.73 4090.93,3073.39
  Bottom Layer w5: pad.PC22@2997.88,3899.61 3043.42,3883.22 ; pad.PC22@2999.85,3904.31 3043.42,3883.22 ; pad.PC22@3002.29,3908.73 3043.42,3883.22 ; pad.PC22@3005.15,3912.85 3043.42,3883.22 ; pad.PC22@3009.2,3896.33 cw(c3009.2,3845.33) 3045.25,3881.39 cw(c3081.31,3917.45) pad.PC22@3030.32,3917.45 ; pad.PC22@3009.2,3901.33 cw(c3009.2,3862.4) 3036.72,3889.93 cw(c3064.24,3917.45) pad.PC22@3025.32,3917.45 ; pad.PC22@3009.2,3906.33 cw(c3009.2,3879.48) 3028.18,3898.46 cw(c3047.17,3917.45) pad.PC22@3020.32,3917.45 ; pad.PC22@3009.2,3917.45 3048.5,3878.14 v1@3048.5,3582 ; pad.PC22@3013.79,3921.49 3043.42,3883.22 ; pad.PC22@3017.91,3924.36 3043.42,3883.22 ; pad.PC22@3022.34,3926.79 3043.42,3883.22 ; pad.PC22@3027.03,3928.77 3043.42,3883.22 ; v1@3045,3580.18 3048.5,3603.31 ; v1@3046.61,3583.89 ccw(c3042.05,3588.45) 3048.5,3588.45 ; 3048.5,3598.11 ccw(c3068.61,3598.11) v1@3054.39,3583.89 ; v1(3050.5,3580) 3048.5,3603.31 ; v1@3055.89,3581.11 3048.5,3603.31